# Altium PCB PCB1.PcbDoc (part 1 of 2)
Units mm, origin at the board's own origin, x right, y up, seen from the top; angles counter-clockwise.
Board outline 41.15 x 66.04 mm, 4 copper layers (Top Layer, Layer 1, Layer 2, Bottom Layer), stack 0.603 mm thick; 69 components, 38 nets, 199 pads, 412 vias.
Unrouted connection lines stored in the file: 4.
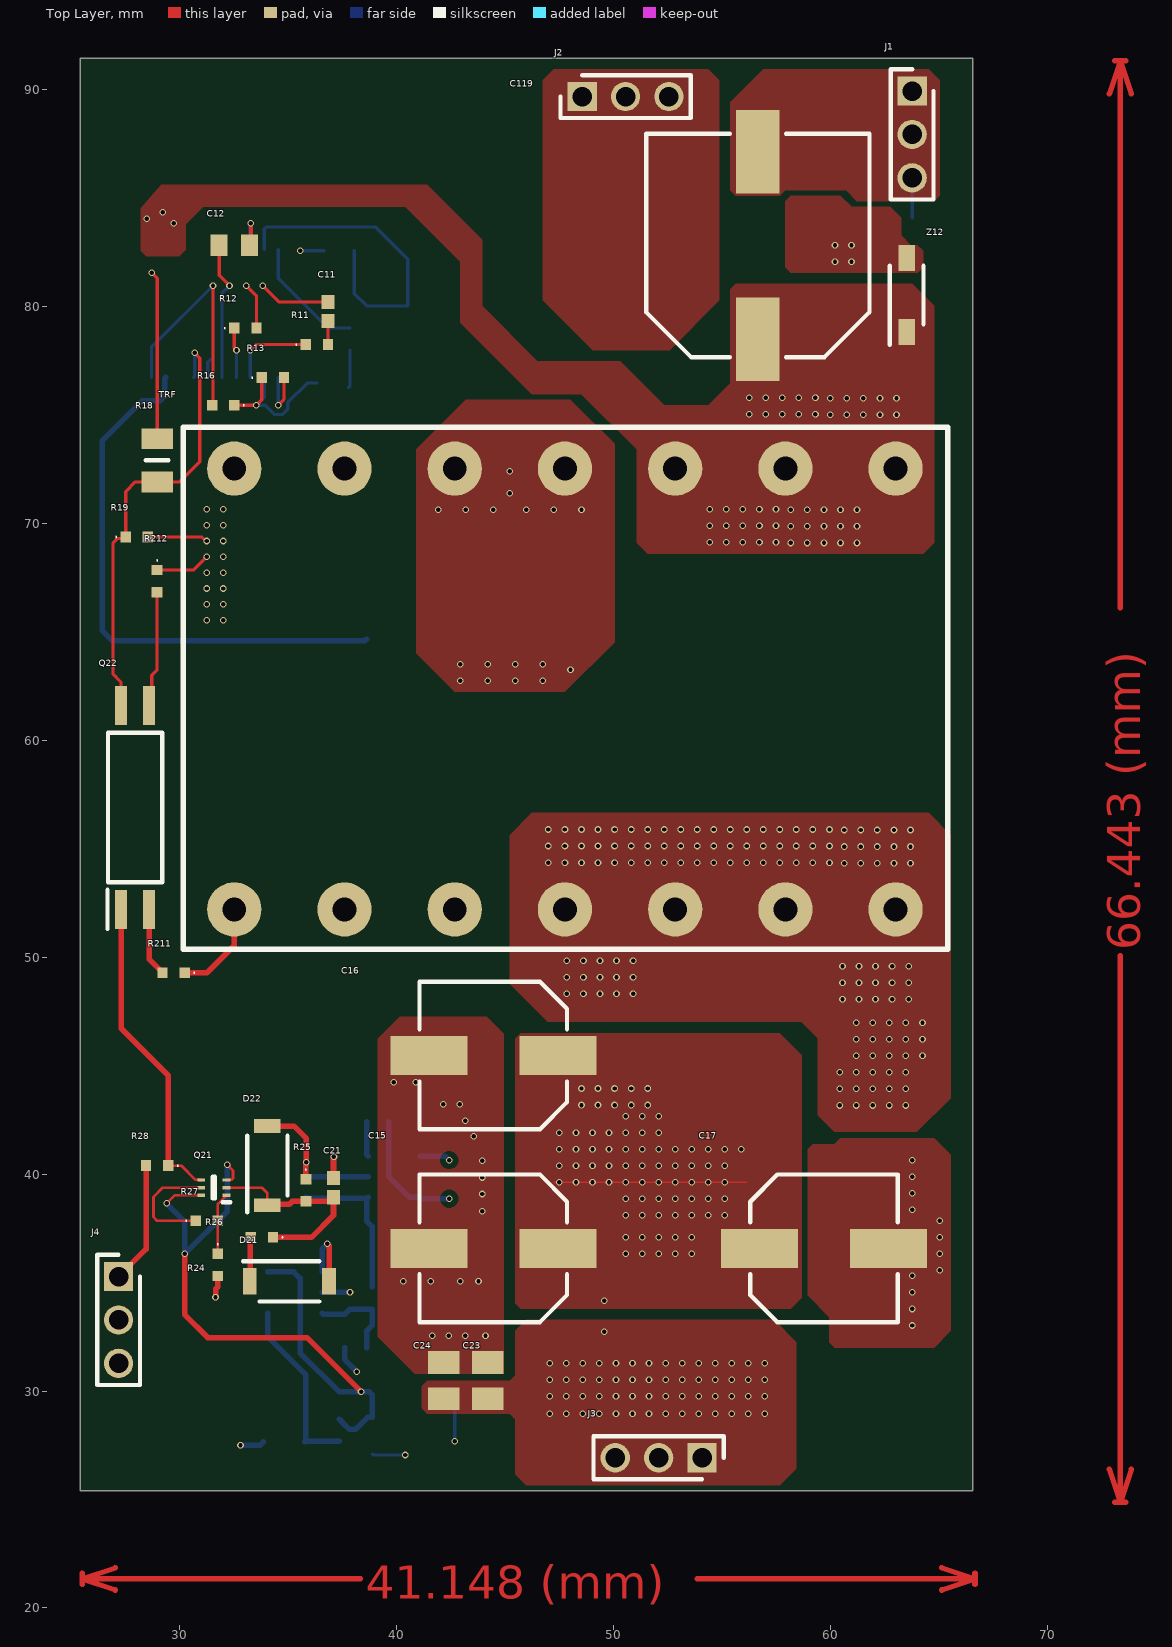
[diagram p0: Top Layer view]
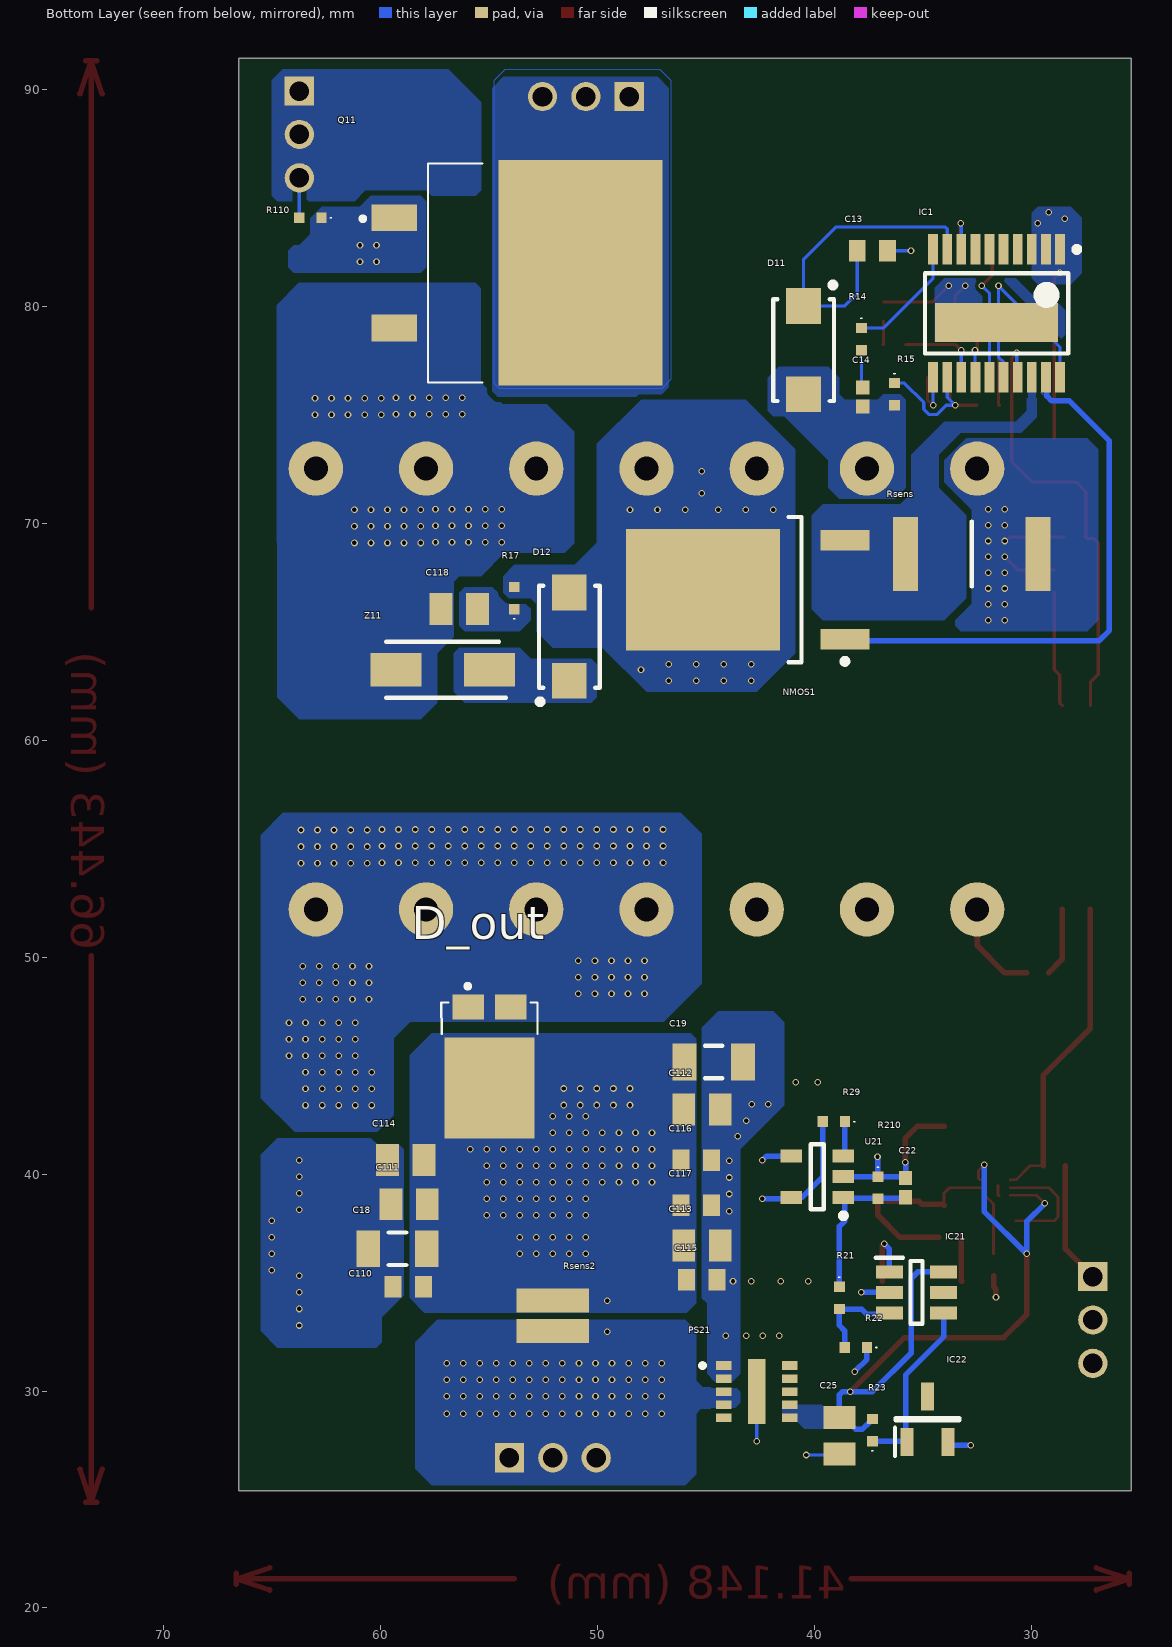
[diagram p1: Bottom Layer view, seen from below]
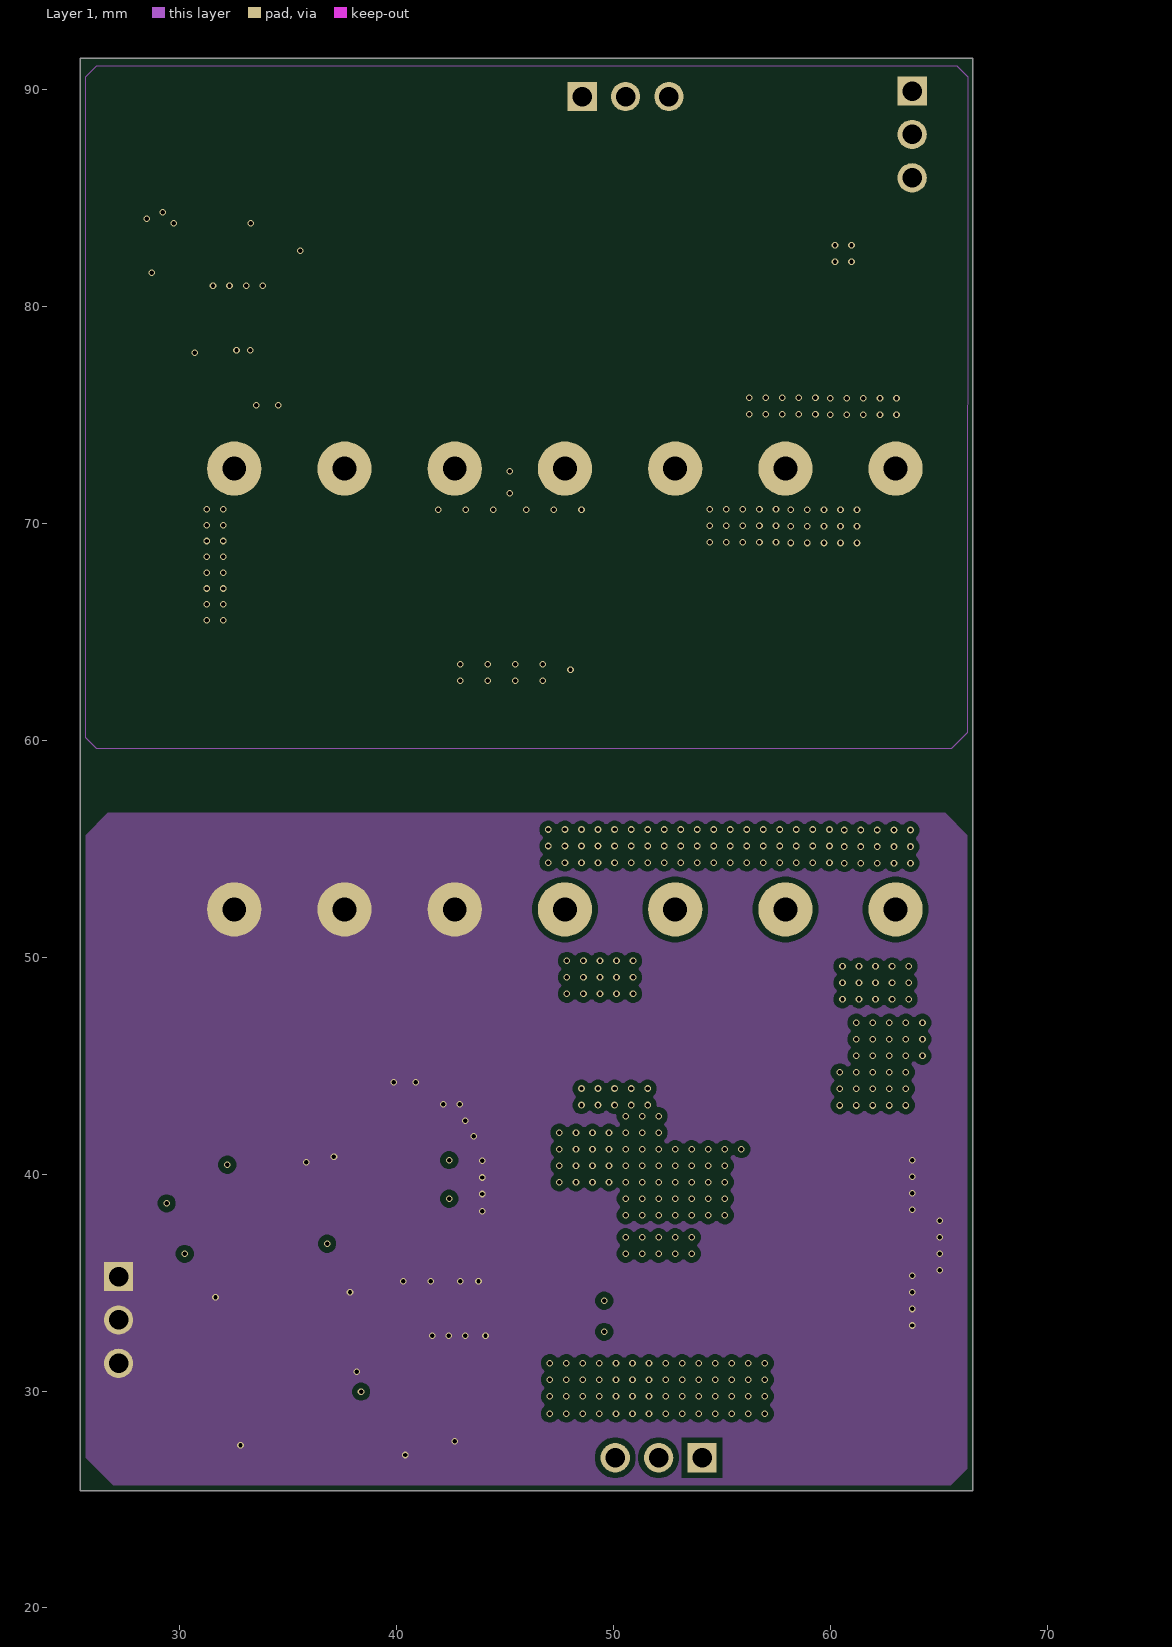
[diagram p2: Layer 1]
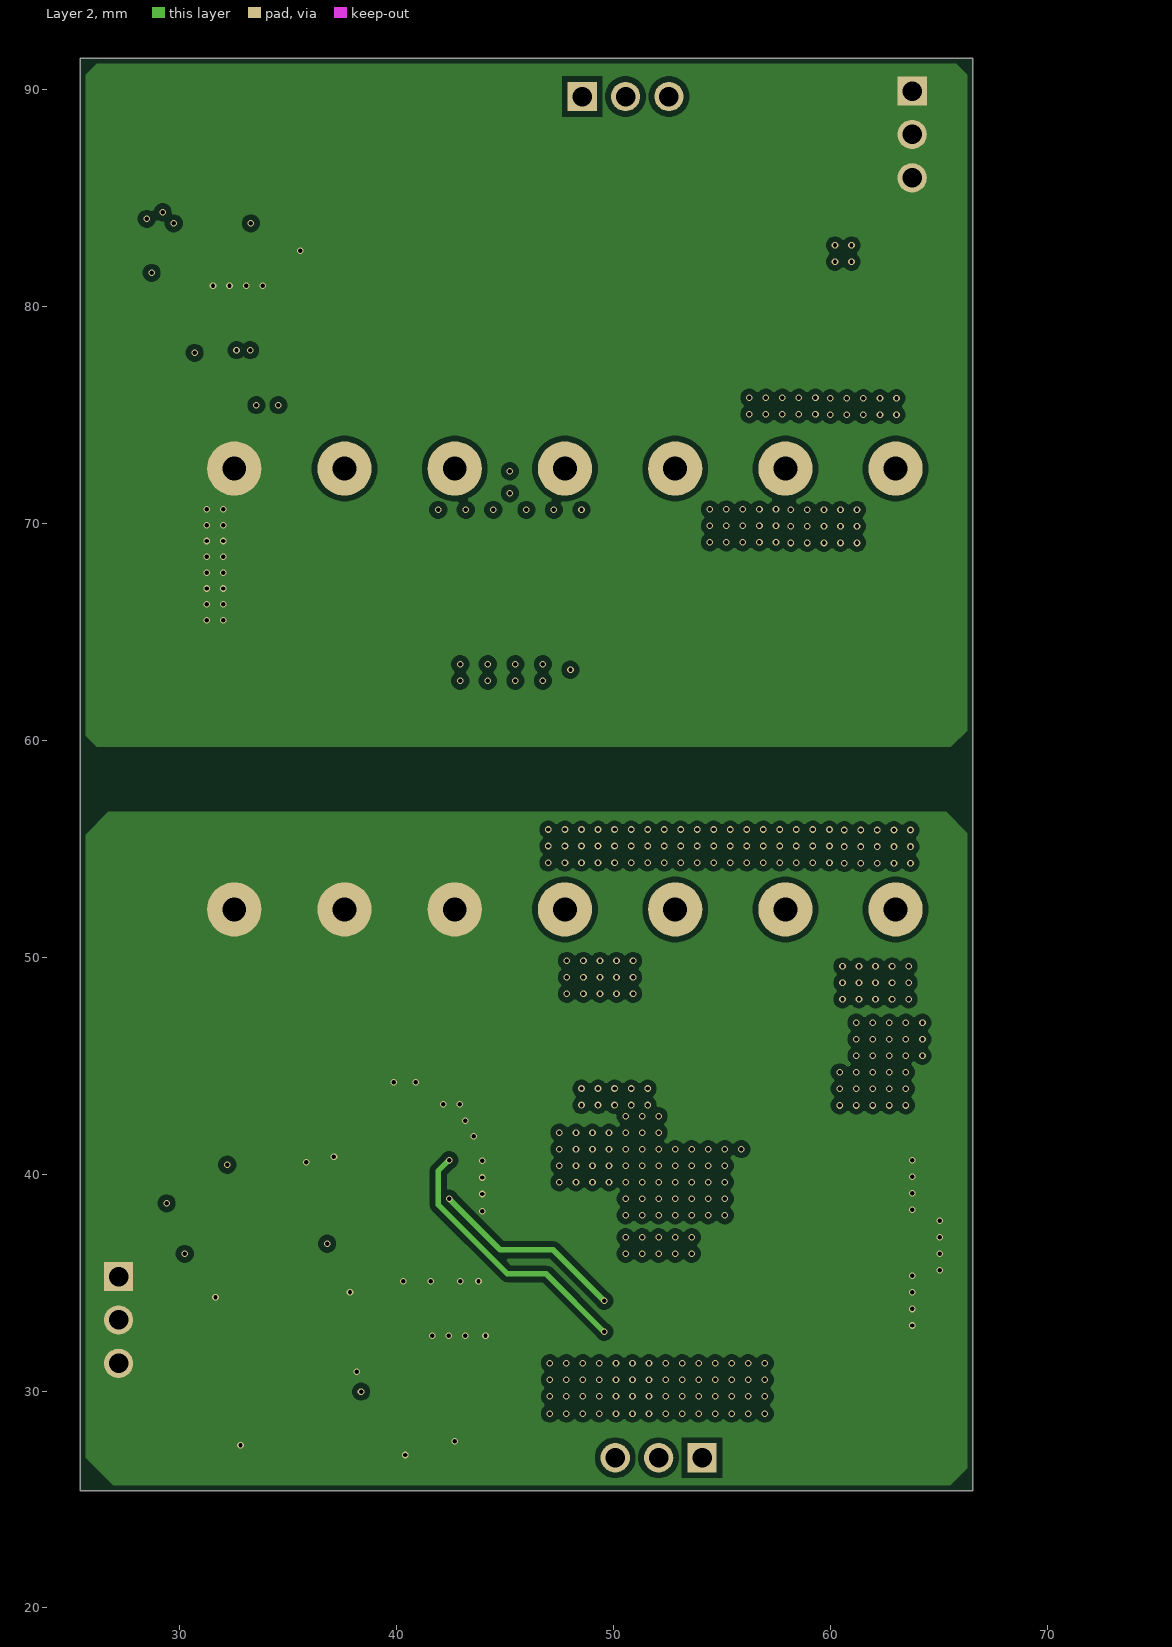
[diagram p3: Layer 2]
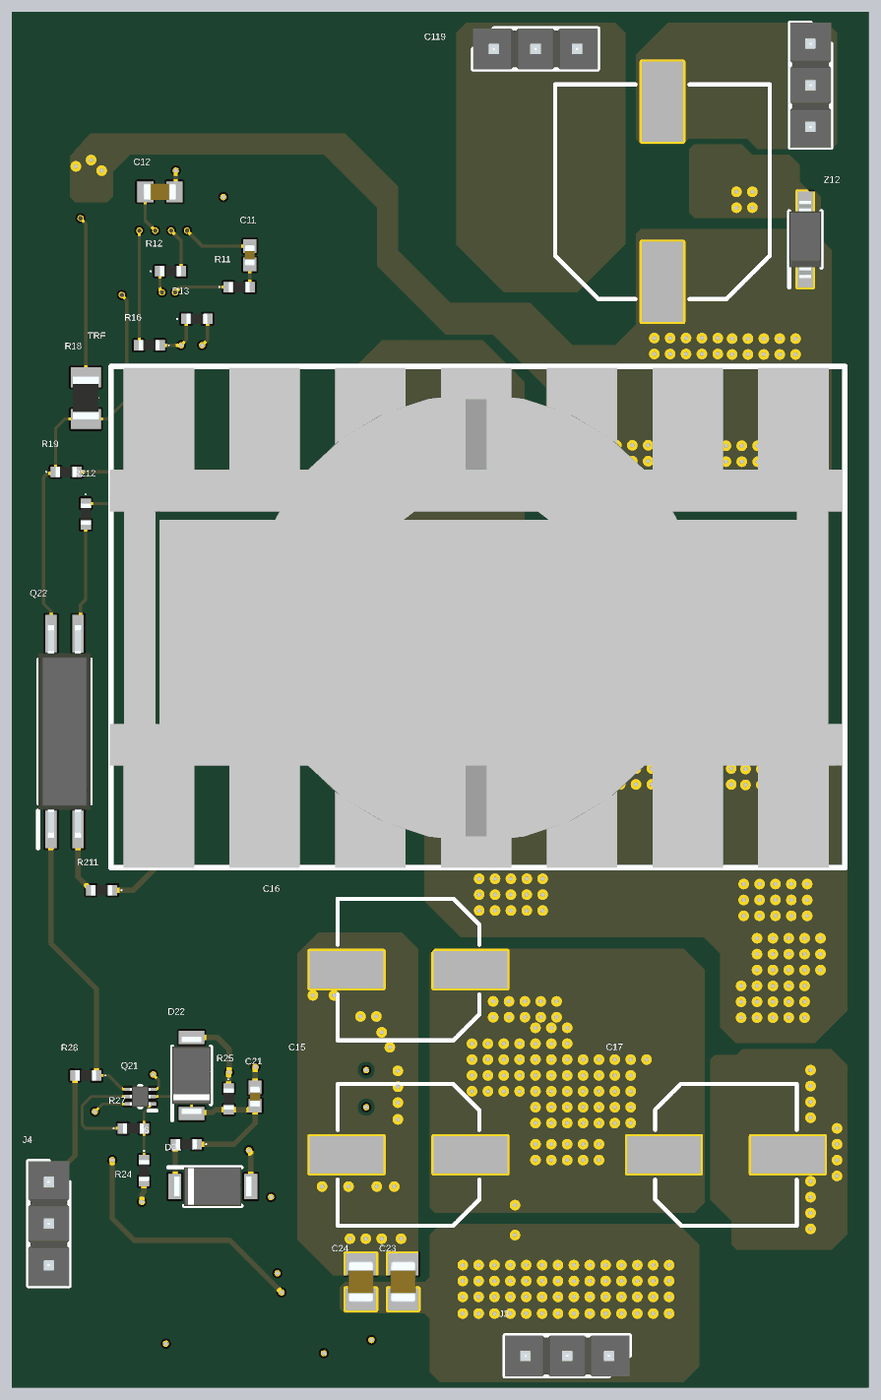
[diagram p4: 3D render of the assembled board from above, using the file's embedded part models]
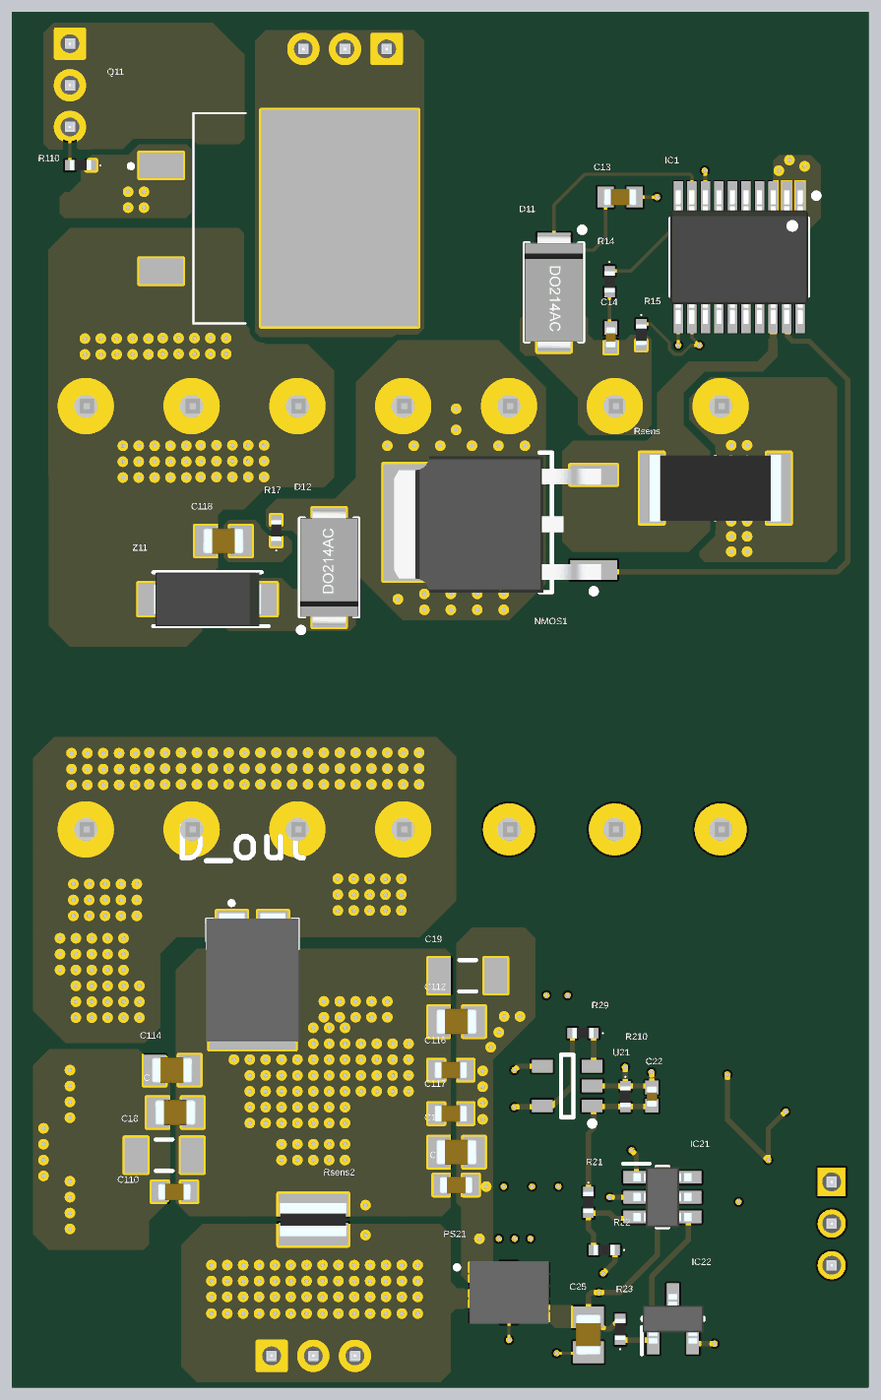
[diagram p5: 3D render of the assembled board from below, using the file's embedded part models]

## Layer stack, top to bottom
Top Solder: solder mask 0.0102, Solder Resist, Dk 3.5
Top Layer: signal copper 0.0356
Dielectric 2: prepreg 0.0711, PP-006, Dk 4.1
Layer 1: signal copper 0.035
Dielectric 1: dielectric 0.32, FR-4, Dk 4.8
Layer 2: signal copper 0.035
Dielectric 3: prepreg 0.0711, PP-006, Dk 4.1
Bottom Layer: signal copper 0.0356
Bottom Solder: solder mask 0.0102, Solder Resist, Dk 3.5

## Board outline
25.4,25.4 66.548,25.4 66.548,91.44 25.4,91.44

## Design rules (kind name [scope] priority, off if disabled: settings)
Clearance Clearance_1 [All] p1: gap=0.254 ignorepadtopadclearanceinfootprint=FALSE except(0.102: Arc-SMDPad Arc-THPad SMDPad-SMDPad THPad-THPad; 0.152: Track-Track Track-SMDPad Track-Via SMDPad-Via THPad-Via Via-Via)
Clearance [All] p2 off: gap=0.254 ignorepadtopadclearanceinfootprint=TRUE except(0: Arc-Hole Track-Hole SMDPad-Hole THPad-Hole Via-Hole Fill-Hole Poly-Hole Region-Hole Text-Hole; 0.152: Arc-SMDPad SMDPad-SMDPad)
PolygonConnect PolygonConnect_42 [All vs IsNamedPolygon('Bottom Layer-Input')] p1: connectstyle=Direct reliefconductorwidth=0.254 reliefentries=4 polygonreliefangle="90 Angle" airgapwidth=0.254
PolygonConnect PolygonConnect_41 [All vs IsNamedPolygon('GND_L02_P067') Or IsNamedPolygon('GND_L03_P066')] p2: connectstyle=Direct reliefconductorwidth=0.254 reliefentries=4 polygonreliefangle="90 Angle" airgapwidth=0.254
PolygonConnect PolygonConnect_40 [All vs IsNamedPolygon('GND_OUT_L03_P065')] p3: connectstyle=Direct reliefconductorwidth=0.254 reliefentries=4 polygonreliefangle="90 Angle" airgapwidth=0.254
PolygonConnect PolygonConnect_39 [All vs IsNamedPolygon('GND_OUT_L02_P064')] p4: connectstyle=Direct reliefconductorwidth=0.254 reliefentries=4 polygonreliefangle="90 Angle" airgapwidth=0.254
PolygonConnect PolygonConnect_38 [All vs IsNamedPolygon('Bottom Layer-GND')] p5: connectstyle=Direct reliefconductorwidth=0.254 reliefentries=4 polygonreliefangle="90 Angle" airgapwidth=0.254
PolygonConnect PolygonConnect_37 [All vs IsNamedPolygon('GND_OUT_L01_P059') Or IsNamedPolygon('GND_OUT_L04_P058')] p6: connectstyle=Direct reliefconductorwidth=0.254 reliefentries=4 polygonreliefangle="90 Angle" airgapwidth=0.254
PolygonConnect PolygonConnect_36 [All vs IsNamedPolygon('Top Layer-GND_out') Or IsNamedPolygon('Bottom Layer-GND_out')] p7: connectstyle=Direct reliefconductorwidth=0.254 reliefentries=4 polygonreliefangle="90 Angle" airgapwidth=0.254
PolygonConnect PolygonConnect_35 [All vs IsNamedPolygon('5V_L04_P053')] p8: connectstyle=Direct reliefconductorwidth=0.254 reliefentries=4 polygonreliefangle="90 Angle" airgapwidth=0.254
PolygonConnect PolygonConnect_34 [All vs IsNamedPolygon('5V_L04_P050')] p9: connectstyle=Direct reliefconductorwidth=0.254 reliefentries=4 polygonreliefangle="90 Angle" airgapwidth=0.254
PolygonConnect PolygonConnect_33 [All vs IsNamedPolygon('GND_L04_P049')] p10: connectstyle=Direct reliefconductorwidth=0.254 reliefentries=4 polygonreliefangle="90 Angle" airgapwidth=0.254
PolygonConnect PolygonConnect_32 [All vs IsNamedPolygon('GND_L04_P041')] p11: connectstyle=Direct reliefconductorwidth=0.254 reliefentries=4 polygonreliefangle="90 Angle" airgapwidth=0.254
PolygonConnect PolygonConnect_31 [All vs IsNamedPolygon('INPUT_L04_P047')] p12: connectstyle=Direct reliefconductorwidth=0.254 reliefentries=4 polygonreliefangle="90 Angle" airgapwidth=0.254
PolygonConnect PolygonConnect_30 [All vs IsNamedPolygon('Top Layer-Input')] p13: connectstyle=Direct reliefconductorwidth=0.254 reliefentries=4 polygonreliefangle="90 Angle" airgapwidth=0.254
PolygonConnect PolygonConnect_29 [All vs IsNamedPolygon('INPUT_PRO_L01_P042') Or IsNamedPolygon('INPUT_PRO_L04_P043')] p14: connectstyle=Direct reliefconductorwidth=0.254 reliefentries=4 polygonreliefangle="90 Angle" airgapwidth=0.254
PolygonConnect PolygonConnect_28 [All vs IsNamedPolygon('GND_L01_P040') Or IsNamedPolygon('GND_L04_P041')] p15: connectstyle=Direct reliefconductorwidth=0.254 reliefentries=4 polygonreliefangle="90 Angle" airgapwidth=0.254
PolygonConnect PolygonConnect_27 [All vs IsNamedPolygon('GND_L01_P040') Or IsNamedPolygon('GND_L04_P041')] p16: connectstyle=Direct reliefconductorwidth=0.254 reliefentries=4 polygonreliefangle="90 Angle" airgapwidth=0.254
PolygonConnect PolygonConnect_26 [All vs IsNamedPolygon('NETQ11_1_L01_P036') Or IsNamedPolygon('NETQ11_1_L04_P038')] p17: connectstyle=Direct reliefconductorwidth=0.254 reliefentries=4 polygonreliefangle="90 Angle" airgapwidth=0.254
PolygonConnect PolygonConnect_25 [All vs IsNamedPolygon('INPUT_L04_P034')] p18: connectstyle=Direct reliefconductorwidth=0.254 reliefentries=4 polygonreliefangle="90 Angle" airgapwidth=0.254
PolygonConnect PolygonConnect_24 [All vs IsNamedPolygon('INPUT_L01_P033')] p19: connectstyle=Direct reliefconductorwidth=0.254 reliefentries=4 polygonreliefangle="90 Angle" airgapwidth=0.254
PolygonConnect PolygonConnect_23 [All vs IsNamedPolygon('INPUT_L01_P033')] p20: connectstyle=Direct reliefconductorwidth=0.254 reliefentries=4 polygonreliefangle="90 Angle" airgapwidth=0.254
PolygonConnect PolygonConnect_22 [All vs IsNamedPolygon('VOUT_L04_P032')] p21: connectstyle=Direct reliefconductorwidth=0.254 reliefentries=4 polygonreliefangle="90 Angle" airgapwidth=0.254
PolygonConnect PolygonConnect_21 [All vs IsNamedPolygon('VOUT_L01_P026')] p22: connectstyle=Direct reliefconductorwidth=0.254 reliefentries=4 polygonreliefangle="90 Angle" airgapwidth=0.254
PolygonConnect PolygonConnect_20 [All vs IsNamedPolygon('Top Layer-NetD_out_1') Or IsNamedPolygon('Bottom Layer-NetD_out_1')] p23: connectstyle=Direct reliefconductorwidth=0.254 reliefentries=4 polygonreliefangle="90 Angle" airgapwidth=0.254
PolygonConnect PolygonConnect_19 [All vs IsNamedPolygon('NETD_OUT_1_L01_P022') Or IsNamedPolygon('NETD_OUT_1_L04_P021')] p24: connectstyle=Direct reliefconductorwidth=0.254 reliefentries=4 polygonreliefangle="90 Angle" airgapwidth=0.254
PolygonConnect PolygonConnect_18 [All vs IsNamedPolygon('OUT+_L01_P017') Or IsNamedPolygon('OUT+_L04_P018')] p25: connectstyle=Direct reliefconductorwidth=0.254 reliefentries=4 polygonreliefangle="90 Angle" airgapwidth=0.254
PolygonConnect PolygonConnect_17 [All vs IsNamedPolygon('NETD12_1_L04_P016')] p26: thpad.connectstyle=Direct thpad.reliefconductorwidth=0.254 thpad.reliefentries=4 thpad.polygonreliefangle="90 Angle" thpad.airgapwidth=0.254 smdpad.connectstyle=Direct smdpad.reliefconductorwidth=0.254 smdpad.reliefentries=4 smdpad.polygonreliefangle="90 Angle" smdpad.airgapwidth=0.254 via.connectstyle=Relief via.reliefconductorwidth=0.254 via.reliefentries=4 via.polygonreliefangle="90 Angle" via.airgapwidth=0.254
PolygonConnect PolygonConnect_16 [All vs IsNamedPolygon('NETC118_2_L04_P015')] p27: thpad.connectstyle=Direct thpad.reliefconductorwidth=0.254 thpad.reliefentries=4 thpad.polygonreliefangle="90 Angle" thpad.airgapwidth=0.254 smdpad.connectstyle=Direct smdpad.reliefconductorwidth=0.254 smdpad.reliefentries=4 smdpad.polygonreliefangle="90 Angle" smdpad.airgapwidth=0.254 via.connectstyle=Relief via.reliefconductorwidth=0.254 via.reliefentries=4 via.polygonreliefangle="90 Angle" via.airgapwidth=0.254
PolygonConnect PolygonConnect_15 [All vs IsNamedPolygon('OUT+_L01_P000') Or IsNamedPolygon('NETD12_2_L01_P014') Or IsNamedPolygon('NETD12_2_L04_P013') Or IsNamedPolygon('NETNMOS1_3_L04_P006') Or IsNamedPolygon('NONET_L04_P010') Or IsNamedPolygon('SENSE+_L04_P004')] p28: connectstyle=Direct reliefconductorwidth=0.254 reliefentries=4 polygonreliefangle="90 Angle" airgapwidth=0.254
PolygonConnect PolygonConnect_14 [All vs IsNamedPolygon('NETD12_2_L01_P014')] p29: thpad.connectstyle=Direct thpad.reliefconductorwidth=0.254 thpad.reliefentries=4 thpad.polygonreliefangle="90 Angle" thpad.airgapwidth=0.254 smdpad.connectstyle=Direct smdpad.reliefconductorwidth=0.254 smdpad.reliefentries=4 smdpad.polygonreliefangle="90 Angle" smdpad.airgapwidth=0.254 via.connectstyle=Relief via.reliefconductorwidth=0.254 via.reliefentries=4 via.polygonreliefangle="90 Angle" via.airgapwidth=0.254
PolygonConnect PolygonConnect_13 [All vs IsNamedPolygon('NETD12_2_L01_P014')] p30: thpad.connectstyle=Direct thpad.reliefconductorwidth=0.254 thpad.reliefentries=4 thpad.polygonreliefangle="90 Angle" thpad.airgapwidth=0.254 smdpad.connectstyle=Direct smdpad.reliefconductorwidth=0.254 smdpad.reliefentries=4 smdpad.polygonreliefangle="90 Angle" smdpad.airgapwidth=0.254 via.connectstyle=Relief via.reliefconductorwidth=0.254 via.reliefentries=4 via.polygonreliefangle="90 Angle" via.airgapwidth=0.254
PolygonConnect PolygonConnect_12 [All vs IsNamedPolygon('OUT+_L01_P000')] p31: thpad.connectstyle=Direct thpad.reliefconductorwidth=0.254 thpad.reliefentries=4 thpad.polygonreliefangle="90 Angle" thpad.airgapwidth=0.254 smdpad.connectstyle=Direct smdpad.reliefconductorwidth=0.254 smdpad.reliefentries=4 smdpad.polygonreliefangle="90 Angle" smdpad.airgapwidth=0.254 via.connectstyle=Relief via.reliefconductorwidth=0.254 via.reliefentries=4 via.polygonreliefangle="90 Angle" via.airgapwidth=0.254
PolygonConnect PolygonConnect_11 [All vs IsNamedPolygon('NETD12_2_L04_P013')] p32: thpad.connectstyle=Direct thpad.reliefconductorwidth=0.254 thpad.reliefentries=4 thpad.polygonreliefangle="90 Angle" thpad.airgapwidth=0.254 smdpad.connectstyle=Direct smdpad.reliefconductorwidth=0.254 smdpad.reliefentries=4 smdpad.polygonreliefangle="90 Angle" smdpad.airgapwidth=0.254 via.connectstyle=Relief via.reliefconductorwidth=0.254 via.reliefentries=4 via.polygonreliefangle="90 Angle" via.airgapwidth=0.254
PolygonConnect PolygonConnect_10 [All vs IsNamedPolygon('NETD12_2_L04_P012')] p33: connectstyle=Direct reliefconductorwidth=0.254 reliefentries=4 polygonreliefangle="90 Angle" airgapwidth=0.254
PolygonConnect PolygonConnect_9 [All vs IsNamedPolygon('NETD12_2_L01_P011')] p34: thpad.connectstyle=Direct thpad.reliefconductorwidth=0.254 thpad.reliefentries=4 thpad.polygonreliefangle="90 Angle" thpad.airgapwidth=0.254 smdpad.connectstyle=Direct smdpad.reliefconductorwidth=0.254 smdpad.reliefentries=4 smdpad.polygonreliefangle="90 Angle" smdpad.airgapwidth=0.254 via.connectstyle=Relief via.reliefconductorwidth=0.254 via.reliefentries=4 via.polygonreliefangle="90 Angle" via.airgapwidth=0.254
PolygonConnect PolygonConnect_8 [All vs IsNamedPolygon('NETNMOS1_3_L04_P006')] p35: thpad.connectstyle=Direct thpad.reliefconductorwidth=0.254 thpad.reliefentries=4 thpad.polygonreliefangle="90 Angle" thpad.airgapwidth=0.254 smdpad.connectstyle=Direct smdpad.reliefconductorwidth=0.254 smdpad.reliefentries=4 smdpad.polygonreliefangle="90 Angle" smdpad.airgapwidth=0.254 via.connectstyle=Relief via.reliefconductorwidth=0.254 via.reliefentries=4 via.polygonreliefangle="90 Angle" via.airgapwidth=0.254
PolygonConnect PolygonConnect_7 [All vs IsNamedPolygon('SENSE+_L04_P004')] p36: thpad.connectstyle=Direct thpad.reliefconductorwidth=0.254 thpad.reliefentries=4 thpad.polygonreliefangle="90 Angle" thpad.airgapwidth=0.254 smdpad.connectstyle=Direct smdpad.reliefconductorwidth=0.254 smdpad.reliefentries=4 smdpad.polygonreliefangle="90 Angle" smdpad.airgapwidth=0.254 via.connectstyle=Relief via.reliefconductorwidth=0.254 via.reliefentries=4 via.polygonreliefangle="90 Angle" via.airgapwidth=0.254
PolygonConnect PolygonConnect_6 [All vs IsNamedPolygon('NETNMOS1_3_L02_P002')] p37: thpad.connectstyle=Direct thpad.reliefconductorwidth=0.254 thpad.reliefentries=4 thpad.polygonreliefangle="90 Angle" thpad.airgapwidth=0.254 smdpad.connectstyle=Direct smdpad.reliefconductorwidth=0.254 smdpad.reliefentries=4 smdpad.polygonreliefangle="90 Angle" smdpad.airgapwidth=0.254 via.connectstyle=Relief via.reliefconductorwidth=0.254 via.reliefentries=4 via.polygonreliefangle="90 Angle" via.airgapwidth=0.254
PolygonConnect PolygonConnect_5 [All vs IsNamedPolygon('OUT+_L01_P000')] p38: thpad.connectstyle=Direct thpad.reliefconductorwidth=0.254 thpad.reliefentries=4 thpad.polygonreliefangle="90 Angle" thpad.airgapwidth=0.254 smdpad.connectstyle=Direct smdpad.reliefconductorwidth=0.254 smdpad.reliefentries=4 smdpad.polygonreliefangle="90 Angle" smdpad.airgapwidth=0.254 via.connectstyle=Relief via.reliefconductorwidth=0.254 via.reliefentries=4 via.polygonreliefangle="90 Angle" via.airgapwidth=0.254
PolygonConnect PolygonConnect_4 [All vs IsNamedPolygon('OUT+_L01_P000')] p39: thpad.connectstyle=Direct thpad.reliefconductorwidth=0.254 thpad.reliefentries=4 thpad.polygonreliefangle="90 Angle" thpad.airgapwidth=0.254 smdpad.connectstyle=Direct smdpad.reliefconductorwidth=0.254 smdpad.reliefentries=4 smdpad.polygonreliefangle="90 Angle" smdpad.airgapwidth=0.254 via.connectstyle=Relief via.reliefconductorwidth=0.254 via.reliefentries=4 via.polygonreliefangle="90 Angle" via.airgapwidth=0.254
PolygonConnect PolygonConnect_3 [All vs IsNamedPolygon('NETD12_2_L01_P001')] p40: thpad.connectstyle=Direct thpad.reliefconductorwidth=0.254 thpad.reliefentries=4 thpad.polygonreliefangle="90 Angle" thpad.airgapwidth=0.254 smdpad.connectstyle=Direct smdpad.reliefconductorwidth=0.254 smdpad.reliefentries=4 smdpad.polygonreliefangle="90 Angle" smdpad.airgapwidth=0.254 via.connectstyle=Relief via.reliefconductorwidth=0.254 via.reliefentries=4 via.polygonreliefangle="90 Angle" via.airgapwidth=0.254
PolygonConnect PolygonConnect_2 [All vs IsNamedPolygon('OUT+_L01_P000')] p41: thpad.connectstyle=Direct thpad.reliefconductorwidth=0.254 thpad.reliefentries=4 thpad.polygonreliefangle="90 Angle" thpad.airgapwidth=0.254 smdpad.connectstyle=Direct smdpad.reliefconductorwidth=0.254 smdpad.reliefentries=4 smdpad.polygonreliefangle="90 Angle" smdpad.airgapwidth=0.254 via.connectstyle=Relief via.reliefconductorwidth=0.254 via.reliefentries=4 via.polygonreliefangle="90 Angle" via.airgapwidth=0.254
PolygonConnect PolygonConnect_1 [All vs IsNamedPolygon('OUT+_L01_P000')] p42: thpad.connectstyle=Direct thpad.reliefconductorwidth=0.254 thpad.reliefentries=4 thpad.polygonreliefangle="90 Angle" thpad.airgapwidth=0.254 smdpad.connectstyle=Direct smdpad.reliefconductorwidth=0.254 smdpad.reliefentries=4 smdpad.polygonreliefangle="90 Angle" smdpad.airgapwidth=0.254 via.connectstyle=Relief via.reliefconductorwidth=0.254 via.reliefentries=4 via.polygonreliefangle="90 Angle" via.airgapwidth=0.254
PolygonConnect [All] p43: connectstyle=Relief reliefconductorwidth=0.254 reliefentries=4 polygonreliefangle="90 Angle" airgapwidth=0.254
RoutingVias [All] p1: holewidth=0.203 width=0.254 viastyle="Through Hole" minholewidth=0.152 minwidth=0.203 maxholewidth=0.254 maxwidth=0.305
SolderMaskExpansion [All] p1: expansion=0.102 istentingtop=FALSE
Width [All] p1: maxlimit=0.254 minlimit=0.127 preferedwidth=0.254 toplayer_prefwidth=0.152 midlayer1_minwidth=0.254 midlayer2_minwidth=0.254 bottomlayer_prefwidth=0.152 minimp=50.000000 maximp=50.000000 favimp=50.000000
30 further rules are at their usual default settings.

## Classes and differential pairs
component class Power: C11 C12 C13 C14 C15 C16 C17 C18 C19 C110 C111 C112 C113 C114 C115 C116 C117 C118 C119 D11 D12 D_out IC1 J1 J2 J3 J4 NMOS1 Q11 R11 R12 R13 R14 R15 R16 R17 R18 R19 R110 Rsens Rsens2 TRF Z11 Z12
component class Control: C21 C22 C23 C24 C25 D21 D22 IC21 IC22 PS21 Q21 Q22 R21 R22 R23 R24 R25 R26 R27 R28 R29 R210 R211 R212 U21

## Components (designator, comment, footprint, x,y, rotation, side; value= is the part's Value field where it differs from the comment)
C11 "C0402" CAPC1005X55N 36.83,79.756 r90 top locked
C12 "C0603" CAPC1608X90N 32.512,82.804 r180 top locked
C13 "C0603" CAPC1608X90N 37.338,82.55 r180 bottom locked
C14 "C0402" CAPC1005X55N 37.786,75.819 r90 bottom locked
C15 "100uF" CAPAEDH107M016A9G 44.45,36.576 r180 top locked
C16 "100uF" CAPAEDH107M016A9G 44.45,45.466 r180 top locked
C17 "100uF" CAPAEDH107M016A9G 59.69,36.576 r0 top locked
C18 "Cap Semi" C1206 59.23,36.557 r0 bottom locked value=47uF
C19 "Cap Semi" C1206 44.656,45.171 r180 bottom locked value=47uF
C21 "100nF" CAPC1005X55N 37.084,39.37 r90 top locked
C22 "100nF" CAPC1005X55N 35.814,39.37 r90 bottom locked
C23 "10uF" CAPC2012X145N 44.196,30.48 r90 top locked
C24 "10uF" CAPC2012X145N 42.164,30.48 r90 top locked
C25 "10uF" CAPC2012X145N 38.862,27.94 r270 bottom locked
C110 "1uF" CAPC1608X90N 58.736,34.798 r0 bottom locked
C111 "10uF" CAPC2012X145N 58.695,38.608 r0 bottom locked
C112 "10uF" CAPC2012X145N 45.191,42.968 r180 bottom locked
C113 "10uF" CAPC2012X145N 45.191,36.704 r180 bottom locked
C114 "10uF" CAPC2012X145N 58.85,40.64 r0 bottom locked
C115 "1uF" CAPC1608X90N 45.212,35.125 r180 bottom locked
C116 "1uF" CAPC1608X90N 45.466,40.64 r180 bottom locked
C117 "1uF" CAPC1608X90N 45.466,38.552 r180 bottom locked
C118 "C0805" CAPC2012X145N 56.388,66.04 r180 bottom locked
C119 "2.7uF" CAPAE127P600-8N 56.642,82.804 r90 top locked
D11 "RB058L" RB058L 40.513,77.978 r270 bottom locked
D12 "RB058L" RB058L 51.308,64.77 r90 bottom locked
D21 "1N4007FLTR" SODFL3718X140N 35.052,35.052 r0 top locked
D22 "1N4007FLTR" SODFL3718X140N 34.036,40.386 r90 top locked
D_out "FSV12100V" FSV1045V 54.991,44.958 r90 bottom locked
IC1 "LT8316" TSOP65P640X120-20N 31.619,79.668 r270 bottom locked
IC21 "LMH6618MK_NOPB" SOT95P280X110-6N 35.306,34.544 r180 bottom locked
IC22 "LM4041CIM3-1.2+T" SOT95P237X112-3N 34.798,28.702 r90 bottom locked
J1 "TMM-103-03-G-S" HDRV3W50P0X200_1X3_600X197X550P 63.754,89.916 r90 top locked
J2 "TMM-103-03-G-S" HDRV3W50P0X200_1X3_600X197X550P 48.546,89.662 r180 top locked
J3 "TMM-103-03-G-S" HDRV3W50P0X200_1X3_600X197X550P 54.07,26.924 r0 top locked
J4 "TMM-103-03-G-S" HDRV3W50P0X200_1X3_600X197X550P 27.178,35.274 r90 top locked
NMOS1 "IPD80R230" DPAK228P994X241-3N 43.108,66.935 r0 bottom locked
PS21 "LMZM23600V5SILT" LMZM23600SILT 42.671,29.972 r180 bottom locked
Q11 "RSJ151P10TL" RSJ151P10TL 48.825,81.534 r0 bottom locked
Q21 "DMN26D0UDJ-7" SOTFL35P100X50-6N 31.57,39.37 r180 top locked
Q22 "RV1S2281ACCSP-10YC#SC0" SOP130P1020X210-4N 27.94,56.896 r90 top locked
R11 "RES402" ERJ2RKD1004X 36.322,78.232 r0 top locked
R12 "RES402" ERJ2RKD1004X 33.024,78.994 r0 top locked
R13 "RES402" ERJ2RKD1004X 34.29,76.708 r0 top locked
R14 "RES402" ERJ2RKD1004X 37.846,78.486 r270 bottom locked
R15 "RES402" ERJ2RKD1004X 36.322,75.946 r270 bottom locked
R16 "RES402" ERJ2RKD1004X 32.004,75.438 r180 top locked
R17 "RES402" ERJ2RKD1004X 53.848,66.544 r90 bottom locked
R18 "RES805_1.17M" RESC2012X50N 28.956,72.898 r90 top locked
R19 "RES402_6.98K" ERJ2RKD1004X 28.015,69.363 r0 top locked
R21 "3.1K" ERJ2RKD1004X 38.862,34.29 r270 bottom locked
R22 "4.9K" ERJ2RKD1004X 38.104,32.004 r0 bottom locked
R23 "30K" ERJ2RKD1004X 37.338,28.194 r90 bottom locked
R24 "8.87K" ERJ2RKD1004X 33.782,37.084 r180 top locked
R25 "75K" ERJ2RKD1004X 35.814,39.255 r270 top locked
R26 "2.2k" ERJ2RKD1004X 31.75,35.814 r270 top locked
R27 "1K" ERJ2RKD1004X 31.242,37.846 r0 top locked
R28 "1K" ERJ2RKD1004X 28.956,40.386 r180 top locked
R29 "100" ERJ2RKD1004X 39.12,42.418 r0 bottom locked
R110 "100K" ERJ2RKD1004X 63.246,84.074 r0 bottom locked
R210 "13.3K" ERJ2RKD1004X 37.084,39.37 r270 bottom locked
R211 "50" ERJ2RKD1004X 29.718,49.276 r180 top locked
R212 "100" ERJ2RKD1004X 28.952,67.331 r270 top locked
Rsens "3521470RFT" RESC6332X65N 32.768,68.58 r180 bottom locked
Rsens2 "LTR18EZPFLR100" RESC1632X68N 52.07,33.466 r270 bottom locked
TRF "EDT_29" PCBComponent_1 32.512,72.517 r270 top locked
U21 "LT6107" SOT95P245X110-5N 39.878,39.878 r0 bottom locked
Z11 "3SMAJ5919B-TP" DIOM5226X244N 57.15,63.246 r0 bottom locked
Z12 "DDZ15Q-7" SOD3716X145N 63.5,80.518 r90 top locked

## Footprints (in the part's own frame and the unit in brackets; to place one, negate y for a bottom-side part, rotate by r counter-clockwise, add the part's x,y. Pads: shape width x height; smd on the part's side, far side on the other; paste and mask are expansions set on the pad)
C1206 [mm] "Chip Capacitor, Body 3.2x1.6mm, IPC High Density"
  rect 1.1x1.7 smd: 1(-1.35,0) 2(1.35,0)
  silkscreen extent -0.4,-0.75 0.4,0.75, body extent -1.7,-0.9 1.7,0.9, height 1.3
CAPAE127P600-8N [mm]
  rect 3.85x2 smd: 1(-4.325,0) 2(4.325,0)
  silkscreen extent -5.15,-5.15 5.15,5.15, body extent -5.15,-5.15 5.15,5.15, height 13.5
CAPAEDH107M016A9G [mm] "Aluminum Electrolytic Capacitor, Body 6,60x6,60x6,30mm, IPC Low Density"
  rect 3.55x1.8 smd: 1(-2.975,0) 2(2.975,0)
  silkscreen extent -3.4,-3.4 3.4,3.4, body extent -3.4,-3.4 3.4,3.4, height 6.3
CAPC1005X55N [mm]
  rect 0.65x0.62 smd: 1(-0.44,0) 2(0.44,0)
  body extent -0.5,-0.25 0.5,0.25, height 0.55
CAPC1608X90N [mm]
  rect 0.78x0.99 smd: 1(-0.7,0) 2(0.7,0)
  body extent -0.8,-0.41 0.8,0.41, height 0.9
CAPC2012X145N [mm]
  rect 1.05x1.47 smd: 1(-0.84,0) 2(0.84,0)
  body extent -1,-0.62 1,0.62, height 1.45
DIOM5226X244N [mm]
  rect 2.35x1.55 smd: 1(-2.15,0) 2(2.15,0)
  silkscreen extent -2.93,-1.29 2.6,1.29, body extent -2.6,-1.29 2.6,1.29, height 2.44
DPAK228P994X241-3N [mm] "D-PAK, 3-Pads, Body 6,21x6,72mm (max), IPC Medium Density"
  rect 2.25x0.95 smd: 1(-4.5,2.28) 3(-4.5,-2.28)
  rect 7.1x5.6 smd: 4(2.05,0)
  silkscreen extent -4.62,-3.35 -1.9,3.43, body extent -4.86,-3.17 5.08,3.37, height 2.39
ERJ2RKD1004X [mm]
  rect 0.475x0.5 smd: 1(-0.512,0) 2(0.512,0)
  silkscreen extent -0.97,-0.03 -0.93,0.03, body extent -0.5,-0.25 0.5,0.25, height 0.35
FSV1045V [mm]
  rect 1.15x1.45 smd: 1(2.75,0.985) 2(2.75,-0.985)
  rect 4.65x4.15 smd: 3(-1,0)
  silkscreen extent 1.5,-2.22 3.8,2.22, body extent -2.95,-2.22 3.21,2.22, height 1.3
HDRV3W50P0X200_1X3_600X197X550P [mm]
  rect 1.35x1.35 hole 0.9: 1(0,0)
  round 1.35 hole 0.9: 2(-2,0) 3(-4,0)
  silkscreen extent -5,-0.98 1,0.98, body extent -5,-0.98 1,0.98, height 5.5
LMZM23600SILT [mm]
  rect 0.7x0.4 smd: 1(-1.525,1.2) 2(-1.525,0.6) 3(-1.525,0) 4(-1.525,-0.6) 5(-1.525,-1.2) 6(1.525,-1.2) 7(1.525,-0.6) 8(1.525,0) 9(1.525,0.6) 10(1.525,1.2)
  rect 0.8x3 smd: 11(0,0)
  silkscreen extent -2.6,1.1 -2.4,1.3, body extent -1.9,-1.5 1.9,1.5, height 1.68
PCBComponent_1 [mm]
  round 2.5 hole 1.1: 1(0,0) 2(0,5.08) 3(0,10.16) 4(0,15.24) 5(0,20.32) 6(0,25.4) 7(0,30.48) 8(20.32,0) 9(20.32,5.08) 10(20.32,10.16) 11(20.32,15.24) 12(20.32,20.32) 13(20.32,25.4) 14(20.32,30.48)
  silkscreen extent -1.91,-2.35 22.16,32.89, body extent -1.84,-2.41 22.16,32.79, height 40.47
RB058L [mm] "Molded Capacitor, 2-Leads, Body 4,50x2,60mm, IPC Medium Density"
  rect 1.65x1.6 smd: 1(-2.032,0) 2(2.032,0)
  silkscreen extent -3.12,-1.4 2.35,1.47, body extent -2.74,-1.4 2.74,1.4, height 2.34
RESC1632X68N [mm]
  rect 1.1x3.35 smd: 1(-0.7,0) 2(0.7,0)
  body extent -0.8,-1.6 0.8,1.6, height 0.68
RESC2012X50N [mm]
  rect 0.95x1.45 smd: 1(-1,0) 2(1,0)
  silkscreen extent 0,-0.53 0,0.53, body extent -1.02,-0.63 1.02,0.63, height 0.5
RESC6332X65N [mm]
  rect 1.15x3.4 smd: 1(-3.05,0) 2(3.05,0)
  silkscreen extent 0,-1.5 0,1.5, body extent -3.15,-1.6 3.15,1.6, height 0.65
RSJ151P10TL [mm]
  rect 2.1x1.23 smd: 1(10.55,-2.54) 3(10.55,2.54)
  rect 7.55x10.4 smd: 2(1.975,0)
  silkscreen extent 6.5,-5.05 12.1,5.05
SOD3716X145N [mm]
  rect 1.2x0.75 smd: 1(-1.7,0) 2(1.7,0)
  silkscreen extent -2.3,-0.77 1.35,0.77, body extent -1.85,-0.77 1.85,0.77, height 1.45
SODFL3718X140N [mm]
  rect 0.63x1.22 smd: 1(-1.825,0) 2(1.825,0)
  silkscreen extent -2.14,-0.92 1.38,0.92, body extent -1.85,-0.92 1.85,0.92, height 1.4
SOP130P1020X210-4N [mm]
  rect 1.8x0.55 smd: 1(-4.7,0.65) 2(-4.7,-0.65) 3(4.7,-0.65) 4(4.7,0.65)
  silkscreen extent -5.6,-1.25 3.45,1.28, body extent -5.1,-1.25 5.1,1.25, height 2.1
SOT95P237X112-3N [mm]
  rect 1.3x0.6 smd: 1(-1.05,0.95) 2(-1.05,-0.95) 3(1.05,0)
  silkscreen extent -1.7,-1.46 0.05,1.5, body extent -1.18,-1.46 1.18,1.46, height 1.12
SOT95P245X110-5N [mm] "SOT23, 5-Leads, Body 2,90x2,45mm, Pitch 0,95mm, IPC Medium Density"
  rect 1x0.6 smd: 1(-1.2,0.95) 2(-1.2,0) 3(-1.2,-0.95) 4(1.2,-0.95) 5(1.2,0.95)
  silkscreen extent -1.32,-1.5 0.3,1.92, body extent -0.7,-1.5 0.7,1.5, height 1.1
SOT95P280X110-6N [mm]
  rect 1.25x0.6 smd: 1(-1.25,0.95) 2(-1.25,0) 3(-1.25,-0.95) 4(1.25,-0.95) 5(1.25,0) 6(1.25,0.95)
  silkscreen extent -1.88,-1.45 0.28,1.6, body extent -1.4,-1.45 1.4,1.45, height 1.1
SOTFL35P100X50-6N [mm]
  rect 0.365x0.15 smd: 1(-0.582,0.35) 2(-0.582,0) 3(-0.582,-0.35) 4(0.582,-0.35) 5(0.582,0) 6(0.582,0.35)
  silkscreen extent -0.76,-0.5 0.05,0.67, body extent -0.5,-0.5 0.5,0.5, height 0.5
TSOP65P640X120-20N [mm] "TSOP, 20-Leads, Body 6,50x4,40mm, Pitch 0,65mm, IPC Medium Density"
  rect 1.4x0.45 smd mask+0.05: 1(-2.95,2.925) 2(-2.95,2.275) 3(-2.95,1.625) 4(-2.95,0.975) 5(-2.95,0.325) 6(-2.95,-0.325) 7(-2.95,-0.975) 8(-2.95,-1.625) 9(-2.95,-2.275) 10(-2.95,-2.925) 11(2.95,-2.925) 12(2.95,-2.275) 13(2.95,-1.625) 14(2.95,-0.975) 15(2.95,-0.325) 16(2.95,0.325) 17(2.95,0.975) 18(2.95,1.625) 19(2.95,2.275) 20(2.95,2.925)
  rect 1.78x5.68 smd: 21(0.42,0)
  silkscreen extent -3.07,-3.3 1.85,3.82, body extent -3.2,-3.3 3.2,3.3, height 1.2

## Part data
C11 C14 C21 C22: library part C0402C829D3GACTU, "Capacitor", Manufacturer_Name=Kemet, Mouser Part Number=80-C0402C829D3G, Arrow Part Number=C0402C829D3GACTU, Arrow Price/Stock=https://www.arrow.com/en/products/c0402c829d3gactu/kemet-corporation, Datasheet Link=https://content.kemet.com/datasheets/KEM_C1002_X7R_SMD.pdf, Height=0.55mm, Manufacturer_Part_Number=C0402C829D3GACTU, Mouser Price/Stock=https://www.mouser.co.uk/ProductDetail/KEMET/C0402C829D3GACTU?qs=ezuqA1hLDjkKgrGbHuNb0A%3D%3D
C12 C13 C110 C115 C116 C117: library part CC0603KRX7R7BB103, "Capacitor", Manufacturer_Name="YAGEO (PHYCOMP)", Mouser Part Number=603-CC603KRX7R7BB103, Arrow Part Number=CC0603KRX7R7BB103, Arrow Price/Stock=https://www.arrow.com/en/products/cc0603krx7r7bb103/yageo, Datasheet Link=http://www.yageo.com/documents/recent/UPY-GPHC_X7R_6.3V-to-50V_18.pdf, Height=0.9mm, Manufacturer_Part_Number=CC0603KRX7R7BB103, Mouser Price/Stock=https://www.mouser.co.uk/ProductDetail/Yageo/CC0603KRX7R7BB103?qs=5q%252BqlK8CmJRarFmz5k060w%3D%3D
C15 C16 C17: library part CAPEDH107
C18 C19: "Capacitor (Semiconductor SIM Model)", LatestRevisionDate=29-May-2009, LatestRevisionNote="IPC-7351 Footprint Added.", PackageDescription="Chip Capacitor", PackageReference=C1206, Published=8-Jun-2000, Publisher="Altium Limited"
C23 C24 C25 C111 C112 C113 C114 C118: library part GCG21BR71H154KA01K, "Capacitor", Manufacturer_Name="Murata Electronics", Mouser Part Number=81-GCG21BR71H154KA1K, Arrow Part Number=GCG21BR71H154KA01K, Arrow Price/Stock=https://www.arrow.com/en/products/gcg21br71h154ka01k/murata-manufacturing, Datasheet Link=https://psearch.en.murata.com/capacitor/product/GCG21BR71H154KA01%23.html, Height=1.45mm, Manufacturer_Part_Number=GCG21BR71H154KA01K, Mouser Price/Stock=https://www.mouser.co.uk/ProductDetail/Murata-Electronics/GCG21BR71H154KA01K?qs=QzBtWTOodeWaaJ9cJuc7Gg%3D%3D
D21 D22: "Diode", Manufacturer_Name=SMC, Datasheet Link=http://www.smc-diodes.com/propdf/1N4001FL-1N4007FL%20N1646%20REV.A.pdf, Height=1.4mm, Manufacturer_Part_Number=1N4007FLTR
D_out: "Schottky Diode", Manufacturer_Name="ON Semiconductor", Mouser Part Number=512-FSV12100V, Arrow Part Number=FSV12100V, Arrow Price/Stock=https://www.arrow.com/en/products/fsv12100v/on-semiconductor?region=nac, Datasheet Link=https://www.onsemi.com/pub/Collateral/FSV12100V-D.PDF, Height=1.2mm, Manufacturer_Part_Number=FSV12100V, Mouser Price/Stock=https://www.mouser.co.uk/ProductDetail/ON-Semiconductor-Fairchild/FSV12100V?qs=8Nc07tNByyHxUYQ9xyerWQ%3D%3D
IC21: "Integrated Circuit", Arrow Part Number=LMH6618MK/NOPB, Manufacturer_Name="Texas Instruments", Mouser Part Number=926-LMH6618MK/NOPB, Arrow Price/Stock=https://www.arrow.com/en/products/lmh6618mknopb/texas-instruments?region=nac, Datasheet Link=http://www.ti.com/lit/ds/symlink/lmh6618.pdf, Height=1.1mm, Manufacturer_Part_Number=LMH6618MK/NOPB, Mouser Price/Stock=https://www.mouser.co.uk/ProductDetail/Texas-Instruments/LMH6618MK-NOPB?qs=7lkVKPoqpbaHKIKeeUkpDw%3D%3D
IC22: "Integrated Circuit", Manufacturer_Name="Maxim Integrated", Mouser Part Number=700-LM4041CIM3-1.2T, Datasheet Link=https://pdfserv.maximintegrated.com/en/ds/LM4041.pdf, Height=1.12mm, Manufacturer_Part_Number=LM4041CIM3-1.2+T, Mouser Price/Stock=https://www.mouser.co.uk/ProductDetail/Maxim-Integrated/LM4041CIM3-12%2bT?qs=GxOUx7aO6nzSYD%252Bwc9k7xw%3D%3D
J1 J2 J3 J4: "Connector", Manufacturer_Name=SAMTEC, Mouser Part Number=200-TMM10303GS, Arrow Part Number=TMM-103-03-G-S, Arrow Price/Stock=https://www.arrow.com/en/products/tmm-103-03-g-s/samtec, Datasheet Link=https://www.arrow.com/en/products/tmm-103-03-g-s/samtec, Height=5.5mm, Manufacturer_Part_Number=TMM-103-03-G-S, Mouser Price/Stock=https://www.mouser.co.uk/ProductDetail/Samtec/TMM-103-03-G-S?qs=fnpEE5GccuM0dk34m8SAnQ%3D%3D
NMOS1: "Power Mosfet"
PS21: "Power Supply", Manufacturer_Name="Texas Instruments", Mouser Part Number=595-LMZM23600V5SILT, Arrow Part Number=LMZM23600V5SILT, Arrow Price/Stock=https://www.arrow.com/en/products/lmzm23600v5silt/texas-instruments?region=nac, Datasheet Link=https://componentsearchengine.com/Datasheets/2/LMZM23600V5SILT.pdf, Height=1.578mm, Manufacturer_Part_Number=LMZM23600V5SILT, Mouser Price/Stock=https://www.mouser.co.uk/ProductDetail/Texas-Instruments/LMZM23600V5SILT?qs=55YtniHzbhCr0j8%2FvNPzJg%3D%3D
Q11: "MOSFET (P-Channel)", Manufacturer_Name="ROHM Semiconductor", Mouser Part Number=755-RSJ151P10TL, Datasheet Link=https://componentsearchengine.com/Datasheets/1/RSJ151P10TL.pdf, Height=2mm, Manufacturer_Part_Number=RSJ151P10TL, Mouser Price/Stock=https://www.mouser.co.uk/ProductDetail/ROHM-Semiconductor/RSJ151P10TL?qs=npTsUczJOtN3pQwAwZe%252BkQ%3D%3D
Q21: "MOSFET (N-Channel)", Manufacturer_Name="Diodes Inc.", Mouser Part Number=621-DMN26D0UDJ-7, Arrow Part Number=DMN26D0UDJ-7, Arrow Price/Stock=https://www.arrow.com/en/products/dmn26d0udj-7/diodes-incorporated?region=nac, Datasheet Link=https://www.diodes.com/assets/Datasheets/ds31481.pdf, Height=0.5mm, Manufacturer_Part_Number=DMN26D0UDJ-7, Mouser Price/Stock=https://www.mouser.co.uk/ProductDetail/Diodes-Incorporated/DMN26D0UDJ-7?qs=VJbqQHImxEwYAK9Ioc59og%3D%3D
Q22: "Transistor", Manufacturer_Name="Renesas Electronics", Mouser Part Number=968-2281ACCSP10YCSC0, Datasheet Link=https://www.renesas.com/in/en/doc/products/opt/r08ds0185ej0100-rv1s2281a.pdf, Height=2.1mm, Manufacturer_Part_Number=RV1S2281ACCSP-10YC#SC0, Mouser Price/Stock=https://www.mouser.co.uk/ProductDetail/Renesas-Electronics/RV1S2281ACCSP-10YCSC0?qs=wnTfsH77Xs7B5%2FobUeyKWw%3D%3D
R11 R12 R13 R14 R15 R16 R17 R19 R21 R22 R23 R24 R25 R26 R27 R28 R29 R110 R210 R211 R212: library part ERJ2RKF4023X, "Resistor", Manufacturer_Name=Panasonic, Datasheet Link=http://docs-europe.electrocomponents.com/webdocs/13ba/0900766b813ba21b.pdf, Height=0.4mm, Manufacturer_Part_Number=ERJ2RKF4023X
R18: library part CRCW0805160RFKEA, "Resistor", Manufacturer_Name=Vishay, Mouser Part Number=71-CRCW0805160RFKEA, Arrow Part Number=CRCW0805160RFKEA, Arrow Price/Stock=https://www.arrow.com/en/products/crcw0805160rfkea/vishay, Datasheet Link=http://www.vishay.com/docs/20035/dcrcwe3.pdf, Height=0.5mm, Manufacturer_Part_Number=CRCW0805160RFKEA, Mouser Price/Stock=https://www.mouser.co.uk/ProductDetail/Vishay-Dale/CRCW0805160RFKEA?qs=bMjB6bAaLENAK7tiR9oJIA%3D%3D
Rsens: "Resistor", Manufacturer_Name="TE Connectivity", Mouser Part Number=279-3521470RFT, Arrow Part Number=3521470RFT, Arrow Price/Stock=https://www.arrow.com/en/products/3521470rft/te-connectivity, Datasheet Link=http://docs-emea.rs-online.com/webdocs/1096/0900766b81096b90.pdf, Height=0.65mm, Manufacturer_Part_Number=3521470RFT, Mouser Price/Stock=https://www.mouser.com/Search/Refine.aspx?Keyword=279-3521470RFT
Rsens2: "Resistor", Manufacturer_Name="ROHM Semiconductor", Mouser Part Number=755-LTR18EZPFLR100, Datasheet Link=https://componentsearchengine.com/Datasheets/1/LTR18EZPFLR100.pdf, Height=0.68mm, Manufacturer_Part_Number=LTR18EZPFLR100, Mouser Price/Stock=https://www.mouser.co.uk/ProductDetail/ROHM-Semiconductor/LTR18EZPFLR100?qs=493kPxzlxfIvjOOFIGs2zg%3D%3D
TRF: "Transformer"
Z11: "Zener Diode", Manufacturer_Name="Micro Commercial Components (MCC)", Mouser Part Number=833-3SMAJ5919B-TP, Arrow Part Number=3SMAJ5919B-TP, Arrow Price/Stock=https://www.arrow.com/en/products/3smaj5919b-tp/micro-commercial-components, Datasheet Link=https://componentsearchengine.com/Datasheets/1/3SMAJ5919B-TP.pdf, Height=2.44mm, Manufacturer_Part_Number=3SMAJ5919B-TP, Mouser Price/Stock=https://www.mouser.co.uk/ProductDetail/Micro-Commercial-Components-MCC/3SMAJ5919B-TP?qs=ZNK0BnemlqFOug%252B1FuXOvQ%3D%3D
Z12: "Zener Diode", Manufacturer_Name="Diodes Inc.", Mouser Part Number=621-DDZ15Q-7, Datasheet Link=https://www.diodes.com/assets/Datasheets/Ds30407.pdf, Height=1.45mm, Manufacturer_Part_Number=DDZ15Q-7, Mouser Price/Stock=https://www.mouser.co.uk/ProductDetail/Diodes-Incorporated/DDZ15Q-7?qs=26fMNUst%2FUDpVXvTBmYYxg%3D%3D

## Via types
v1: diameter 0.305, hole 0.203, Top Layer to Bottom Layer, 412 vias

## Nets (pads, with @x,y where several pads share a name; then routed paths per layer and width w, separated by ;. In a path a pad name is that pad's centre, name@x,y a point inside that pad or via, vN(x,y) a via of type N, cw(c..) or ccw(c..) an arc to the next point about the centre after c; other vN are vias at no path point)
1.225V: IC21.4 IC22.1 R23.1 | length 8.3
  Bottom Layer w0.254: IC21.4 34.056,32.492 35.814,30.734 35.814,27.718 IC22.1@35.778,27.682 ; IC22.1 IC22.1@35.778,27.682 ; R23.1 IC22.1@35.778,27.682
5V: C25.1 IC21.6 PS21.6 PS21.7 Q21.3 Q21.6 R23.2 | length 35.5
  Top Layer w0.127: v1(29.393,38.65) 29.763,39.02 Q21.6 ; 31.501,38.998 31.552,39.048 31.552,39.476 ; Q21.3 32.164,39.732 32.377,39.732 32.451,39.806 32.451,40.164 v1(32.187,40.428)
  Top Layer w0.254: v1(30.226,36.322) 30.226,33.528 31.289,32.465 35.861,32.465 v1(38.354,29.972)
  Bottom Layer w0.254: v1(29.393,38.65) 30.226,37.817 v1(30.226,36.322) 32.187,38.283 v1(32.187,40.428) ; IC21.6 35.25,35.494 35.55,35.194 35.55,31.76 37.338,29.972 38.713,29.972 38.862,29.823 C25.1 38.652,28.78 38.254,28.382 38.254,28.378 38.105,28.229 37.815,28.229 37.461,28.583 37.461,28.596 37.35,28.706 R23.2
GND: C11.2 C12.2 C13.2 C119.2 IC1.15 IC1.16 IC1.20 IC1.21 J1.1 J1.2 J1.3 R12.2 R16.2 R19.2 R110.2 R212.1 Rsens.2 TRF.1 | length 35.4
  Top Layer w0.152: R19.2 31.016,69.363 31.201,69.178 v1(31.242,69.178) ; R212.1 30.636,67.843 v1(31.242,68.448) ; R16.2 31.496,75.438 31.53,75.472 v1(31.53,80.94) ; C12.2 31.812,81.42 v1(32.292,80.94) ; v1(33.054,80.94) 33.536,80.458 R12.2 ; v1(33.816,80.94) 34.56,80.196 C11.2
  Bottom Layer w0.152: IC1.20 28.694,78.104 v1(31.53,80.94) 31.53,77.654 31.294,77.418 IC1.16 ; IC1.15 31.944,80.592 v1(32.292,80.94) ; v1(35.56,82.55) C13.2 ; J1.3 63.754,84.078 R110.2
  other v1: 31.242,65.532 32.004,65.532 31.242,66.261 32.004,66.261 31.242,66.99 32.004,66.99 31.242,67.719 32.004,67.719 32.004,68.448 32.004,69.178 31.242,69.907 32.004,69.907 31.242,70.636 32.004,70.636
GND_out: C15.2 C16.2 C17.2 C18.2 C19.2 C21.2 C22.2 C23.2 C24.2 C25.2 C110.2 C111.2 C112.2 C113.2 C114.2 C115.2 C116.2 C117.2 D22.2 IC21.2 IC22.2 J4.1 J4.2 J4.3 PS21.1 PS21.2 PS21.11 R22.1 R25.1 R26.2 R28.2 R210.1 R211.1 TRF.8 TRF.9 TRF.10 U21.2 | length 28
  Top Layer w0.254: J4.1 28.444,36.54 R28.2 ; R211.1 31.242,49.276 32.512,50.546 TRF.8 ; v1(31.645,34.314) 31.655,34.324 31.655,34.703 31.75,34.798 R26.2 ; D22.2 35.259,42.211 35.835,41.635 v1(35.835,40.537) 35.835,40.523 35.814,40.503 R25.1 ; C21.2 37.084,40.757 37.105,40.777 v1(37.105,40.791)
  Bottom Layer w0.152: C25.2 38.911,27.051 v1(40.386,27.051) ; PS21.11 PS21.11 v1(42.672,27.686)
  Bottom Layer w0.254: v1(32.799,27.509) 33.705,27.509 IC22.2 ; v1(35.835,40.537) 35.835,40.523 35.814,40.503 C22.2 35.886,39.882 R210.1 37.084,40.757 37.105,40.777 v1(37.105,40.791) ; IC21.2 v1(37.846,34.544) ; R210.1@37.264,39.81 37.334,39.88 38.676,39.88 U21.2 ; R22.1 37.592,31.454 v1(38.156,30.89)
  other v1: 41.638,32.548 42.4,32.548 43.162,32.548 44.091,32.548 63.754,33.02 63.754,33.782 63.754,34.544 40.3,35.052 41.57,35.052 42.926,35.052 43.767,35.052 63.754,35.306 65.024,35.56 65.024,36.322 65.024,37.084 65.024,37.846 43.938,38.279 63.754,38.354 43.938,39.08 63.754,39.116 43.938,39.842 63.754,39.878 43.938,40.604 63.754,40.64 43.551,41.741 43.162,42.454 42.146,43.216 42.908,43.216 39.86,44.232 40.876,44.232
Input: C118.1 C119.1 IC1.1 IC1.2 IC1.3 Q11.3 R18.2 TRF.5 TRF.6 TRF.7 Z11.2 Z12.1 | length 7.7
  Top Layer w0.152: v1(28.702,81.534) 28.956,81.28 R18.2
  other v1: 58.166,69.088 58.928,69.088 59.69,69.088 60.452,69.088 61.214,69.088 54.431,69.112 55.193,69.112 55.955,69.112 56.717,69.112 57.479,69.112 58.166,69.85 58.928,69.85 59.69,69.85 60.452,69.85 61.214,69.85 54.431,69.874 55.193,69.874 55.955,69.874 56.717,69.874 57.479,69.874 58.166,70.612 58.928,70.612 59.69,70.612 60.452,70.612 61.214,70.612 54.431,70.636 55.193,70.636 55.955,70.636 56.717,70.636 57.479,70.636 59.985,74.996 60.747,74.996 61.509,74.996 62.271,74.996 63.033,74.996 56.25,75.019 57.012,75.019 57.774,75.019 58.536,75.019 59.298,75.019 59.985,75.758 60.747,75.758 61.509,75.758 62.271,75.758 63.033,75.758 56.25,75.781 57.012,75.781 57.774,75.781 58.536,75.781 59.298,75.781 29.718,83.82 28.478,84.026 29.21,84.328
Input_PRO: J2.1 J2.2 J2.3 Q11.2
Iout_Error: D21.2 IC21.1 | length 3.2
  Top Layer w0.254: v1(36.791,36.789) 36.791,36.775 36.877,36.689 D21.2
  Bottom Layer w0.254: IC21.1 36.556,36.54 36.791,36.775 v1(36.791,36.789)
Iout_sns: C22.1 R21.1 R210.2 U21.1 | length 7.1
  Bottom Layer w0.254: C22.1 35.85,38.894 37.118,38.894 37.119,38.893 U21.1@38.643,38.893 ; U21.1 U21.1@38.643,38.893 ; R21.1 38.862,37.592 38.608,37.846 38.608,38.858 U21.1@38.643,38.893
NetC11_1: C11.1 R11.2 | length 1.1
  Top Layer w0.152: C11.1 36.83,78.236 R11.2
NetC12_1: C12.1 IC1.8 | length 2.3
  Top Layer w0.178: C12.1 33.274,82.866 v1(33.274,83.82)
  Bottom Layer w0.178: IC1.8 33.244,83.79 v1(33.274,83.82)
NetC13_1: C13.1 D11.1 IC1.9 | length 15.1
  Bottom Layer w0.152: IC1.9 33.894,83.559 33.983,83.648 39.034,83.648 40.513,82.169 D11.1 38.608,80.01 38.038,80.58 C13.1
NetC14_2: C14.2 R14.2 | length 1.7
  Bottom Layer w0.152: C14.2 37.846,76.319 R14.2
NetC21_1: C21.1 D22.1 Q21.2 R24.1 R25.2 | length 9.8
  Top Layer w0.127: Q21.2 33.782,39.37 34.036,39.116 D22.1
  Top Layer w0.254: D22.1 34.083,38.608 35.052,38.608 35.183,38.739 35.81,38.739 R25.2 36.901,38.743 C21.1@37.084,38.926 ; R24.1 36.068,37.084 37.084,38.1 C21.1@37.084,38.926 ; C21.1 C21.1@37.084,38.926
NetC118_2: C118.2 R17.1
NetD12_1: D12.1 Z11.1
NetD12_2: D12.2 NMOS1.4 R17.2 TRF.3 TRF.4
  other v1: 42.926,62.738 44.196,62.738 45.466,62.738 46.736,62.738 48.006,63.246 42.926,63.5 44.196,63.5 45.466,63.5 46.736,63.5 41.91,70.612 43.18,70.612 44.45,70.612 45.974,70.612 47.244,70.612 48.514,70.612 45.212,71.374 45.212,72.39
NetD21_1: D21.1 R24.2 | length 2.1
  Top Layer w0.254: D21.1 33.249,35.074 33.249,37.063 R24.2 ; R24.2@33.253,37.059 R24.2@33.278,37.084
NetD_out_1: D_out.1 D_out.2 TRF.11 TRF.12 TRF.13 TRF.14
  other v1: 60.42,43.162 61.182,43.162 61.944,43.162 62.706,43.162 63.468,43.162 60.42,43.924 61.182,43.924 61.944,43.924 62.706,43.924 63.468,43.924 60.42,44.686 61.182,44.686 61.944,44.686 62.706,44.686 63.468,44.686 61.182,45.448 61.944,45.448 62.706,45.448 63.468,45.448 64.23,45.448 61.182,46.21 61.944,46.21 62.706,46.21 63.468,46.21 64.23,46.21 61.182,46.972 61.944,46.972 62.706,46.972 63.468,46.972 64.23,46.972 60.543,48.048 61.305,48.048 62.067,48.048 62.829,48.048 63.591,48.048 47.843,48.302 48.605,48.302 49.367,48.302 50.129,48.302 50.891,48.302 60.543,48.81 61.305,48.81 62.067,48.81 62.829,48.81 63.591,48.81 47.843,49.064 48.605,49.064 49.367,49.064 50.129,49.064 50.891,49.064 60.543,49.572 61.305,49.572 62.067,49.572 62.829,49.572 63.591,49.572 47.843,49.826 48.605,49.826 49.367,49.826 50.129,49.826 50.891,49.826 60.631,54.332 61.393,54.332 62.155,54.332 62.917,54.332 63.679,54.332 46.99,54.356 47.752,54.356 48.514,54.356 49.276,54.356 50.038,54.356 50.8,54.356 51.562,54.356 52.324,54.356 53.086,54.356 53.848,54.356 54.61,54.356 55.372,54.356 56.134,54.356 56.896,54.356 57.658,54.356 58.42,54.356 59.182,54.356 59.944,54.356 60.631,55.094 61.393,55.094 62.155,55.094 62.917,55.094 63.679,55.094 46.99,55.118 47.752,55.118 48.514,55.118 49.276,55.118 50.038,55.118 50.8,55.118 51.562,55.118 52.324,55.118 53.086,55.118 53.848,55.118 54.61,55.118 55.372,55.118 56.134,55.118 56.896,55.118 57.658,55.118 58.42,55.118 59.182,55.118 59.944,55.118 60.631,55.856 61.393,55.856 62.155,55.856 62.917,55.856 63.679,55.856 46.99,55.88 47.752,55.88 48.514,55.88 49.276,55.88 50.038,55.88 50.8,55.88 51.562,55.88 52.324,55.88 53.086,55.88 53.848,55.88 54.61,55.88 55.372,55.88 56.134,55.88 56.896,55.88 57.658,55.88 58.42,55.88 59.182,55.88 59.944,55.88
NetIC1_4,5,6,7: IC1.4 IC1.5 IC1.6 IC1.7
NetNMOS1_1: IC1.19 NMOS1.1 | length 25.8
  Bottom Layer w0.254: IC1.19 29.3,76.674 29.3,75.86 29.076,75.637 28.263,75.637 26.416,73.79 26.416,65.063 26.908,64.57 38.523,64.57 NMOS1.1
NetNMOS1_3: IC1.18 NMOS1.3 Rsens.1
NetQ11_1: Q11.1 R110.1 Z12.2
  other v1: 60.198,82.042 60.96,82.042 60.198,82.804 60.96,82.804
NetQ21_1: Q21.1 R26.1 R27.2 | length 2.9
  Top Layer w0.127: R26.1 31.754,36.33 R27.2 31.754,38.622 Q21.1
NetQ21_5: Q21.5 R27.1 | length 5.3
  Top Layer w0.127: R27.1 28.956,37.846 28.787,38.015 28.787,38.947 29.21,39.37 Q21.5
NetQ22_2: Q22.2 R211.2 | length 3.2
  Top Layer w0.254: Q22.2 28.59,49.904 29.206,49.288 R211.2
NetQ22_3: Q22.3 R212.2 | length 5.4
  Top Layer w0.152: Q22.3 28.702,61.708 28.702,62.992 28.952,63.242 R212.2
NetR11_1: IC1.13 R11.1 | length 3.9
  Top Layer w0.152: v1(33.244,77.978) 33.498,78.232 R11.1
  Bottom Layer w0.152: IC1.13 v1(33.244,77.978)
NetR12_1: IC1.14 R12.1 | length 2.3
  Top Layer w0.152: R12.1 32.512,78.08 v1(32.614,77.978)
  Bottom Layer w0.152: IC1.14 32.614,76.738 v1(32.614,77.978)
NetR13_1: IC1.12 R13.1 R15.1 R16.1 | length 7.6
  Top Layer w0.152: R16.1 v1(33.528,75.438) 33.778,75.688 R13.1
  Bottom Layer w0.152: IC1.12 33.894,75.804 v1(33.528,75.438) 33.933,75.438 34.365,75.006 34.723,75.006 34.976,75.259 34.976,75.565 35.869,76.458 R15.1
NetR13_2: IC1.11 R13.2 | length 2.7
  Top Layer w0.152: v1(34.544,75.438) 34.802,75.696 R13.2
  Bottom Layer w0.152: v1(34.544,75.438) IC1.11
NetR14_1: IC1.10 R14.1 | length 5.6
  Bottom Layer w0.152: IC1.10 34.544,81.28 36.826,78.998 R14.1
NetR21_2: IC21.3 R21.2 R22.2 | length 4.3
  Bottom Layer w0.254: IC21.3 36.622,33.528 37.592,33.528 37.842,33.778 R21.2 38.862,33.02 38.616,32.774 R22.2
NetR29_1: R29.1 U21.3 | length 1.6
  Bottom Layer w0.254: R29.1 38.608,40.898 U21.3
opto: Q21.4 Q22.1 R28.1 | length 14.5
  Top Layer w0.127: R28.1 30.065,40.386 30.719,39.732 30.976,39.732 Q21.4
  Top Layer w0.254: Q22.1 27.29,46.719 29.468,44.541 R28.1
Opto_pri: IC1.17 Q22.4 R18.1 R19.1 | length 20.7
  Top Layer w0.152: Q22.4 27.29,62.674 26.924,63.04 26.924,69.088 27.126,69.29 27.43,69.29 R19.1 ; R19.1@27.503,69.35 27.503,71.445 27.956,71.898 29.988,71.898 30.924,72.834 30.924,77.61 v1(30.683,77.851)
  Bottom Layer w0.152: IC1.17 30.683,76.758 v1(30.683,77.851)
Out+: C15.1 C16.1 C17.1 C18.1 C19.1 C110.1 C111.1 C112.1 C113.1 C114.1 C115.1 C116.1 C117.1 D_out.3 R29.2 Rsens2.1 U21.5 | length 14.8
  Layer 2 w0.254: v1(42.418,38.862) 44.769,36.511 47.211,36.511 v1(49.562,34.161)
  Bottom Layer w0.254: R29.2 39.632,39.874 40.578,38.928 U21.5 41.134,38.872 42.408,38.872 v1(42.418,38.862)
  other v1: 50.546,36.322 51.308,36.322 52.07,36.322 52.832,36.322 53.594,36.322 50.546,37.084 51.308,37.084 52.07,37.084 52.832,37.084 53.594,37.084 50.546,38.1 51.308,38.1 52.07,38.1 52.832,38.1 53.594,38.1 54.356,38.1 55.118,38.1 50.546,38.862 51.308,38.862 52.07,38.862 52.832,38.862 53.594,38.862 54.356,38.862 55.118,38.862 47.498,39.624 48.26,39.624 49.022,39.624 49.784,39.624 50.546,39.624 51.308,39.624 52.07,39.624 52.832,39.624 53.594,39.624 54.356,39.624 55.118,39.624 47.498,40.386 48.26,40.386 49.022,40.386 49.784,40.386 50.546,40.386 51.308,40.386 52.07,40.386 52.832,40.386 53.594,40.386 54.356,40.386 55.118,40.386 47.498,41.148 48.26,41.148 49.022,41.148 49.784,41.148 50.546,41.148 51.308,41.148 52.07,41.148 52.832,41.148 53.594,41.148 54.356,41.148 55.118,41.148 55.88,41.148 47.498,41.91 48.26,41.91 49.022,41.91 49.784,41.91 50.546,41.91 51.308,41.91 52.07,41.91 50.546,42.672 51.308,42.672 52.07,42.672 48.514,43.18 49.276,43.18 50.038,43.18 50.8,43.18 51.562,43.18 48.514,43.942 49.276,43.942 50.038,43.942 50.8,43.942 51.562,43.942
Sense+: C14.1 D11.2 R15.2 TRF.2
Vout: C23.1 C24.1 J3.1 J3.2 J3.3 PS21.3 PS21.4 Rsens2.2 U21.4 | length 13.8
  Layer 2 w0.254: v1(42.418,40.64) 41.91,40.132 41.91,38.588 45.102,35.396 46.889,35.396 v1(49.562,32.723)
  Bottom Layer w0.254: U21.4 42.216,40.828 42.404,40.64 v1(42.418,40.64)
  other v1: 47.055,28.956 47.817,28.956 48.579,28.956 49.341,28.956 50.103,28.956 50.865,28.956 51.627,28.956 52.389,28.956 53.151,28.956 53.913,28.956 54.675,28.956 55.437,28.956 56.199,28.956 56.961,28.956 47.055,29.757 47.817,29.757 48.579,29.757 49.341,29.757 50.103,29.757 50.865,29.757 51.627,29.757 52.389,29.757 53.151,29.757 53.913,29.757 54.675,29.757 55.437,29.757 56.199,29.757 56.961,29.757 47.055,30.519 47.817,30.519 48.579,30.519 49.341,30.519 50.103,30.519 50.865,30.519 51.627,30.519 52.389,30.519 53.151,30.519 53.913,30.519 54.675,30.519 55.437,30.519 56.199,30.519 56.961,30.519 47.055,31.281 47.817,31.281 48.579,31.281 49.341,31.281 50.103,31.281 50.865,31.281 51.627,31.281 52.389,31.281 53.151,31.281 53.913,31.281 54.675,31.281 55.437,31.281 56.199,31.281 56.961,31.281
pads on no net: IC21.5 IC22.3 PS21.5 PS21.8 PS21.9 PS21.10
copper on no net: | length 90.9
  Top Layer w0.254: 25.504,21.082 25.504,21.59 ; 27.028,20.828 25.504,21.336 ; 27.028,21.844 25.504,21.336 ; 38.308,21.336 25.504,21.336 ; 53.848,21.336 66.652,21.336 ; 65.128,20.828 66.652,21.336 ; 65.128,21.844 66.652,21.336 ; 66.652,21.082 66.652,21.59 ; 72.847,26.389 73.355,24.865 ; 72.847,89.784 73.355,91.308 ; 73.101,24.865 73.609,24.865 ; 73.101,91.308 73.609,91.308 ; 73.355,50.063 73.355,24.865 ; 73.355,66.111 73.355,91.308 ; 73.863,26.389 73.355,24.865 ; 73.863,89.784 73.355,91.308

## Polygon pours and split planes (outlines as drawn)
GND_out on Top Layer "GND_OUT_L01_P059" (solid, pour order 59): 44.931,30.795 40.833,30.795 39.116,32.512 39.116,46.228 40.132,47.244 44.142,47.244 44.931,46.455
GND_out on Top Layer "Top Layer-GND_out" (solid, pour order 57): 64.77,32.004 65.532,32.766 65.532,40.894 64.77,41.656 60.452,41.656 60.171,41.375 59.165,41.375 58.928,41.148 58.928,34.421 59.944,33.405 59.944,32.258 60.198,32.004
Input on Top Layer "Top Layer-Input" (solid, pour order 46): 51.054,73.406 51.054,69.088 51.562,68.58 64.262,68.58 64.77,69.088 64.77,80.01 63.754,81.026 55.626,81.026 55.372,80.772 55.372,76.454 54.356,75.438 52.324,75.438 50.292,77.47 46.482,77.47 43.942,80.01 43.942,83.058 41.402,85.598 29.154,85.598 28.194,84.518 28.194,82.55 28.448,82.296 29.972,82.296 30.277,82.601 30.277,83.769 31.089,84.582 40.386,84.582 42.926,82.042 42.926,79.248 46.228,75.946 48.514,75.946
Input_PRO on Top Layer "INPUT_PRO_L01_P042" (solid, pour order 42): 47.244,90.932 46.736,90.424 46.736,80.264 49.022,77.978 52.578,77.978 54.864,80.264 54.864,90.424 54.356,90.932
GND on Top Layer "GND_L01_P040" (solid, pour order 40): 55.372,89.408 55.372,85.344 55.626,85.09 57.658,85.09 57.912,85.344 60.706,85.344 61.214,84.836 62.992,84.836 64.77,84.836 65.024,85.09 65.024,90.424 64.516,90.932 56.896,90.932
NetQ11_1 on Top Layer "NETQ11_1_L01_P036" (solid, pour order 36): 58.166,85.09 60.452,85.09 60.96,84.582 62.738,84.582 63.246,84.074 63.246,83.269 63.697,82.818 63.994,82.818 64.262,82.55 64.262,81.788 64.008,81.534 58.166,81.534 57.912,81.788 57.912,84.836
Vout on Top Layer "VOUT_L01_P026" (solid, pour order 26): 45.974,33.274 57.404,33.274 58.42,32.258 58.42,26.416 57.658,25.654 45.974,25.654 45.466,26.162 45.466,28.702 45.212,28.956 41.402,28.956 41.148,29.21 41.148,30.226 41.402,30.48 45.212,30.48 45.466,30.734 45.466,32.766
NetD_out_1 on Top Layer "Top Layer-NetD_out_1" (solid, pour order 25): 58.641,47.023 59.403,46.261 59.403,42.705 60.165,41.943 63.975,41.943 65.532,43.499 65.532,55.626 64.516,56.642 46.228,56.642 45.212,55.626 45.212,48.768 46.957,47.023
Out+ on Top Layer "OUT+_L01_P017" (solid, pour order 17): 45.466,46.228 45.466,34.036 45.72,33.782 58.166,33.782 58.674,34.29 58.674,45.466 57.658,46.482 45.72,46.482
NetD12_2 on Top Layer "NETD12_2_L01_P014" (solid, pour order 14): 43.18,75.692 48.006,75.692 50.038,73.66 50.038,64.516 47.752,62.23 42.672,62.23 40.894,64.008 40.894,73.406
Out+ on Top Layer "OUT+_L01_P000" (solid, pour order 0): 47.244,39.624 56.007,39.624 56.134,39.624
Input on Bottom Layer "Bottom Layer-Input" (solid, pour order 69): 54.311,68.625 55.372,67.564 56.388,67.564 56.642,67.31 56.642,64.77 57.404,64.008 57.404,61.722 58.166,60.96 63.754,60.96 64.77,61.976 64.77,69.088 64.791,69.109 64.791,80.055 63.775,81.071 55.647,81.071 55.393,80.817 55.393,76.499 54.377,75.483 52.345,75.483 51.075,74.213 51.075,69.067 51.517,68.625
GND on Bottom Layer "GND_L04_P049" (solid, pour order 49): 28.779,78.358 28.448,78.689 28.448,79.807 29.159,80.518 29.972,80.518 30.734,81.28 34.036,81.28 34.459,80.857 34.459,78.358
GND on Bottom Layer "Bottom Layer-GND" (solid, pour order 63): 33.274,65.024 33.528,65.278 33.528,65.532 32.766,66.294 32.766,70.612 34.036,71.882 34.036,72.898 33.02,73.914 27.432,73.914 26.924,73.406 26.924,65.532 27.432,65.024